# Altium PCB DataSampleHub.PcbDoc (part 2 of 3)
Units mil, origin at the board's own origin, x right, y up, seen from the top; angles counter-clockwise.
Board outline 7885.07 x 6309.28 mil, 2 copper layers (Top Layer, Bottom Layer), stack 65.792 mil thick; 360 components, 225 nets, 1247 pads, 854 vias.
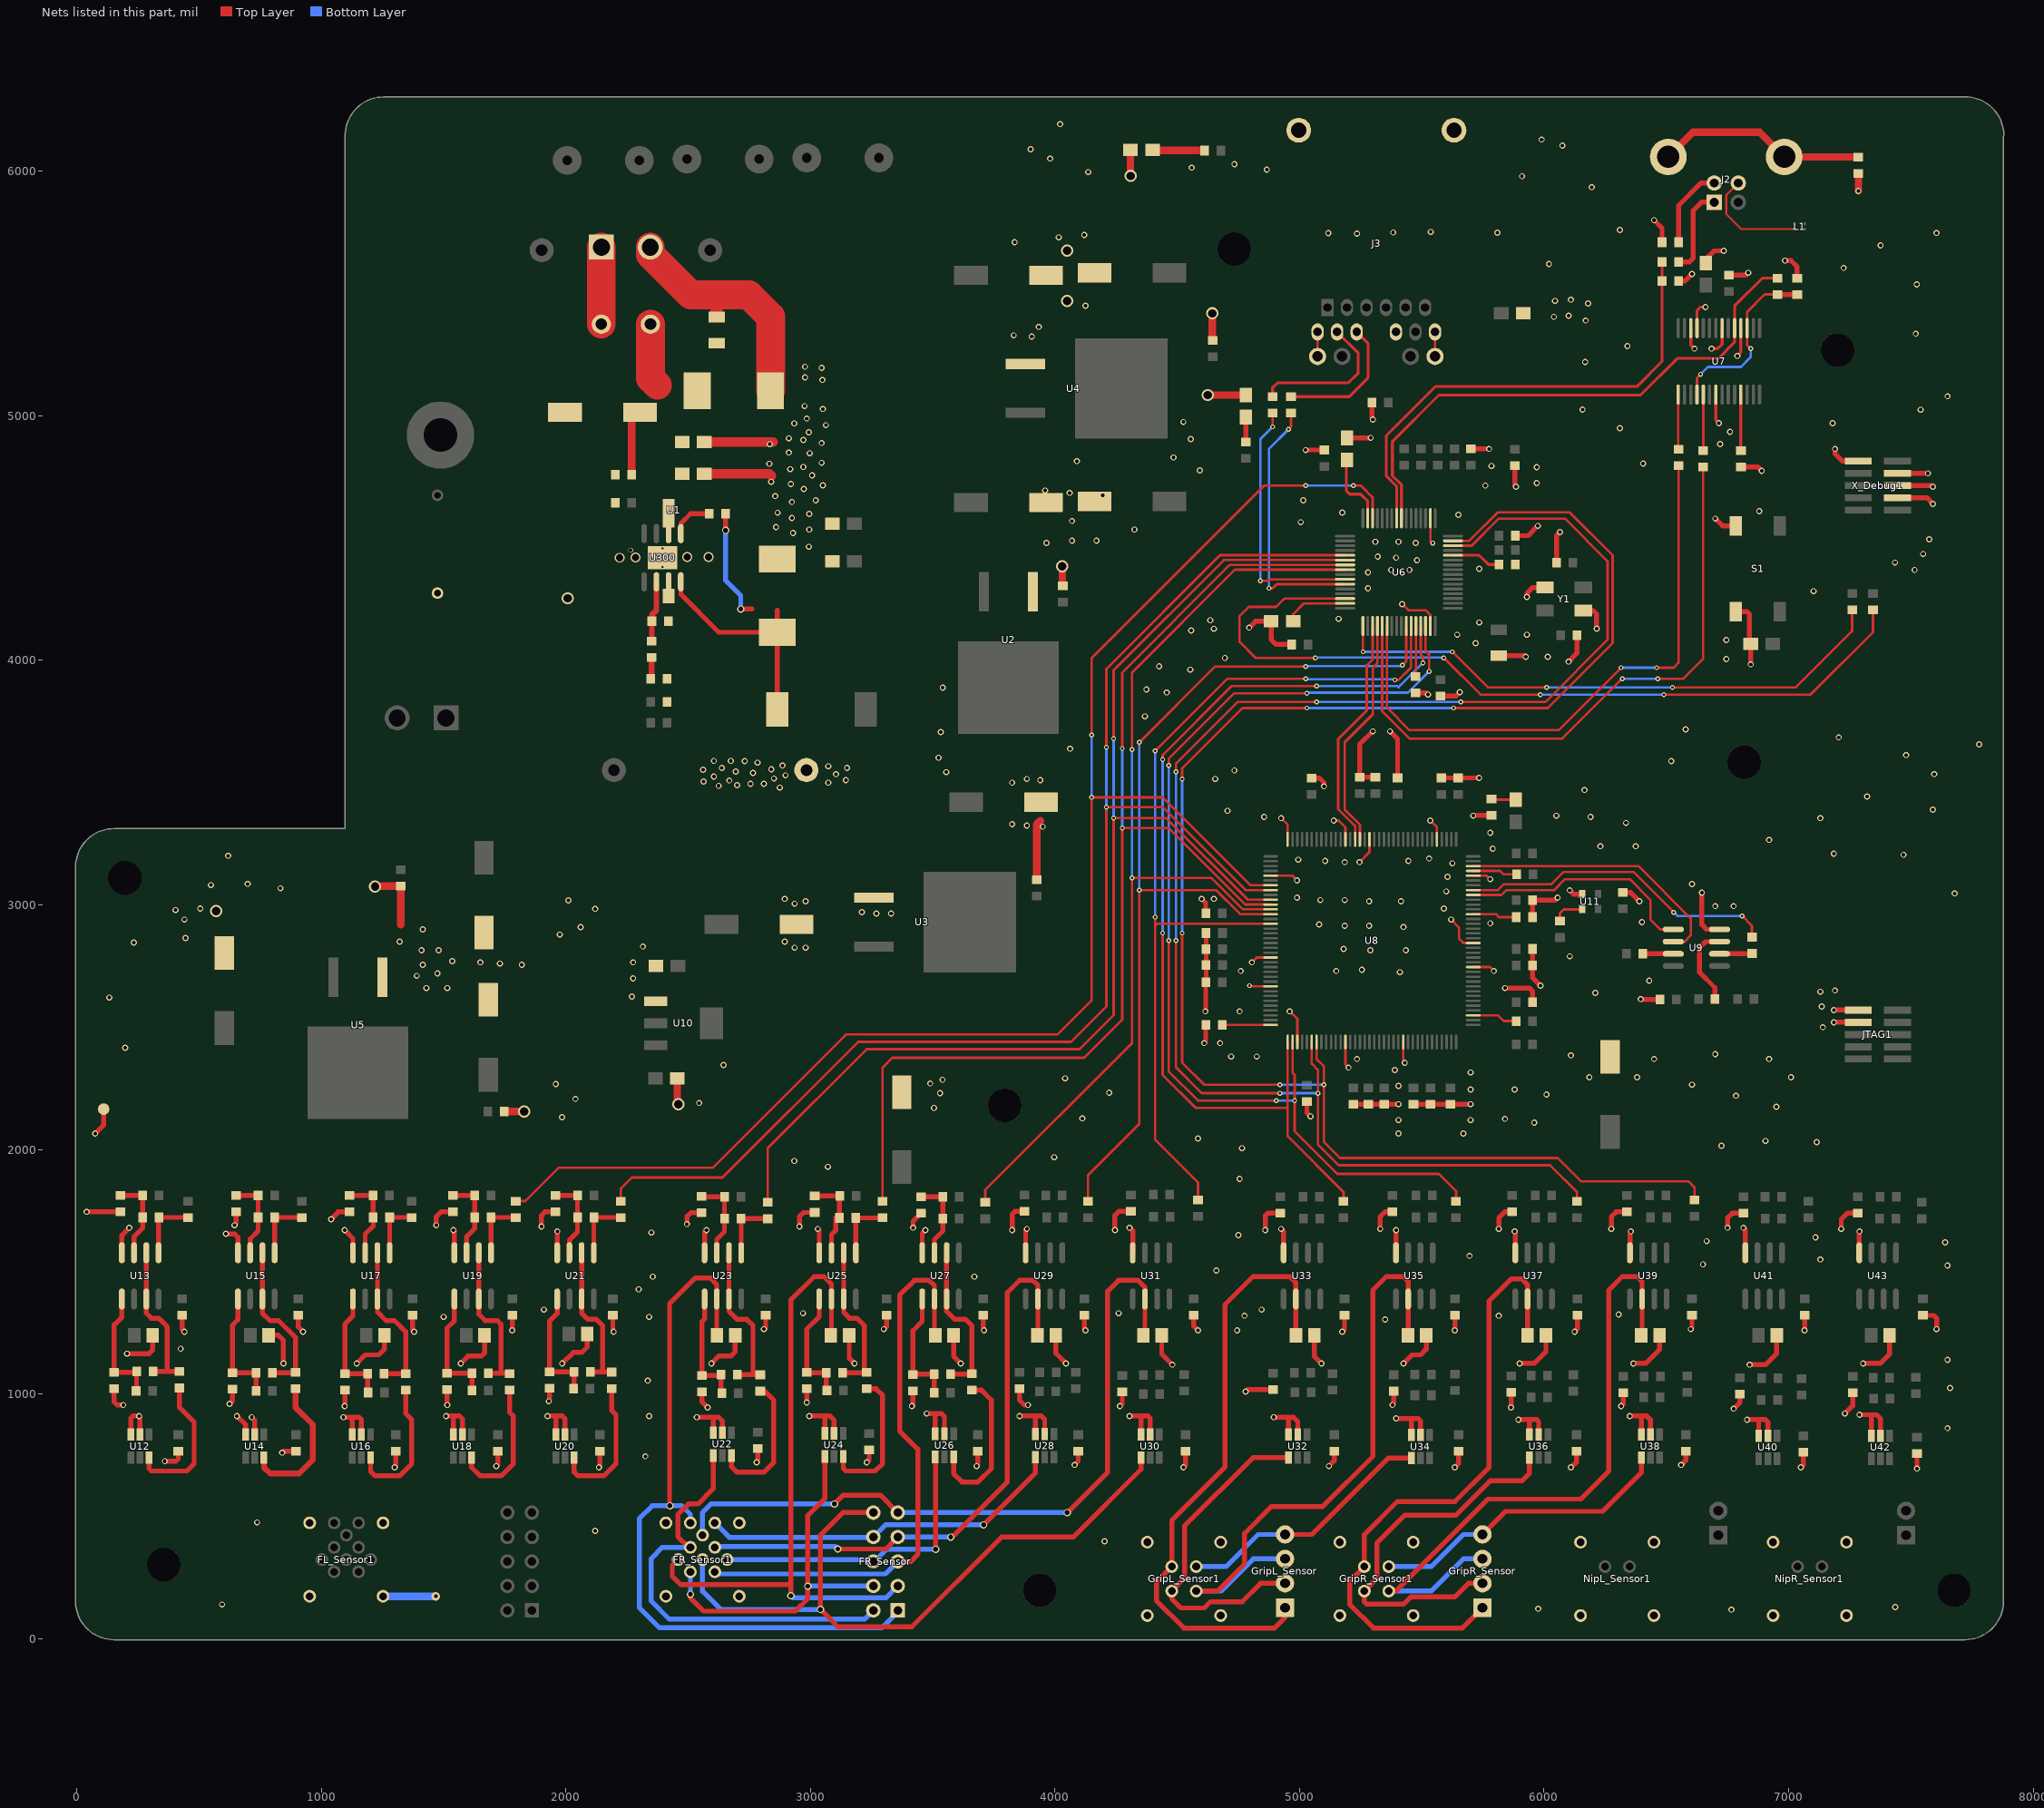
[diagram p2: the nets of this part, all layers, seen from the top]

## Via types
v1: diameter 25, hole 15, Top Layer to Bottom Layer, 584 vias
v2: diameter 20, hole 10, Top Layer to Bottom Layer, 130 vias
v3: diameter 30, hole 20, Top Layer to Bottom Layer, 103 vias
v4: diameter 50, hole 35, Top Layer to Bottom Layer, 11 vias
v5: diameter 100, hole 60, Top Layer to Bottom Layer, 7 vias
v6: diameter 50, hole 30, Top Layer to Bottom Layer, 4 vias
v7: diameter 40, hole 30, Top Layer to Bottom Layer, 4 vias
v8: diameter 19.68, hole 7.87, Top Layer to Bottom Layer, 4 vias
v9: diameter 80, hole 50, Top Layer to Bottom Layer, 2 vias
v10: diameter 133.86, hole 133.86, Top Layer to Bottom Layer, 2 vias
v11: diameter 35, hole 15, Top Layer to Bottom Layer, 1 vias
v12: diameter 60, hole 40, Top Layer to Bottom Layer, 1 vias
v13: diameter 20, hole 15, Top Layer to Bottom Layer, 1 vias

## Nets (pads, with @x,y where several pads share a name; then routed paths per layer and width w, separated by ;. In a path a pad name is that pad's centre, name@x,y a point inside that pad or via, vN(x,y) a via of type N, cw(c..) or ccw(c..) an arc to the next point about the centre after c; other vN are vias at no path point) (continued)
FL_SENSOR4: R23.2 U6.30 U8.115 | length 6522.6
  Top Layer w10: R23.2@1795,1788.46 1833.46,1788.46 1970,1925 2600,1925 3145,2470 4010,2470 4150,2610 v2(4150,3440) 4440,3440 4799.62,3080.38 U8.115@4881.63,3080.38 ; v2(4150,3695) 4150,4010 4855,4715 v2(5025,4715) ; v2(5220,4715) 5250,4715 5298.73,4666.27 U6.30@5298.73,4581.47
  Bottom Layer w10: v2(4150,3440) v2(4150,3695) ; v2(5025,4715) 5026.16,4716.16 5027.32,4715 v2(5220,4715)
FL_SENSOR5: R149.2 U6.37 U8.116 | length 5706.4
  Top Layer w10: R149.2@2225,1788.46 2225,1840 2270,1885 2640,1885 3195,2440 4065,2440 4210,2585 v2(4210,3400) 4440,3400 4779.31,3060.69 U8.116@4881.63,3060.69 ; v2(4210,3645) 4210,3965 4674.9,4429.9 U6.37@5186.53,4429.9
  Bottom Layer w10: v2(4210,3400) v2(4210,3645)
FPGA_CLK: U8.70 U9.6 | length 1130.2
  Top Layer w10: U8.70@5710.37,3159.12 6385.88,3159.12 6600,2945 6600,2875 6575,2850 U9.6@6528.51,2850
FPGA_DIN: R35.2 U8.65 | length 1308.1
  Top Layer w10: U8.65@5710.37,3060.69 5810.69,3060.69 5835,3085 6030,3085 6080,3135 6365,3135 v2(6530,2970) ; v2(6810,2955) 6850,2915 R35.2@6850,2868.46
  Bottom Layer w10: v2(6530,2970) 6545,2955 v2(6810,2955)
FPGA_MISO: R35.1 U9.2 | length 133.1
  Top Layer w20: U9.2@6717.49,2800 6848.46,2800 R35.1@6850,2801.54
FPGA_MOSI: U8.64 U9.5 | length 976.4
  Top Layer w10: U8.64@5710.37,3041.01 5826.01,3041.01 5845,3060 6040,3060 6085,3105 6350,3105 6435,3020 6435,2940 6475,2900 U9.5@6528.51,2900
FR_CON0: C72.2 FR_Sensor1.1 FR_Sensor.1 U23.6 | length 3050.7
  Top Layer w20: v3(2425,543) 2424,544 2424,1369 2530,1475 2590,1475 2617,1448 U23.6@2617,1388.51 2617,1240.6 C72.2@2617.6,1240
  Bottom Layer w20: FR_Sensor1.1@2509.06,472.83 2509.06,507.94 2474,543 v3(2425,543) 2353,543 2300,490 2300,127 2383,44 3292,44 3357.09,109.09 FR_Sensor.1@3357.09,115
FR_CON1: FR_Sensor1.2 FR_Sensor.2 U22.4 | length 1789.5
  Top Layer w20: FR_Sensor1.2@2509.06,372.83 2502.17,372.83 2458,417 2458,507 2501,550 2540,550 2602.6,612.6 U22.4@2602.6,747.76
  Bottom Layer w20: FR_Sensor1.2@2509.06,372.83 2394.83,372.83 2349,327 2349,153 2423,79 3221.09,79 FR_Sensor.2@3257.09,115
FR_CON2: C73.2 FR_Sensor1.3 FR_Sensor.3 U25.6 | length 2668
  Top Layer w20: FR_Sensor1.3@2459.06,322.83 2435,298.78 2435,255 2470,220 2910,220 2920,230 ; v3(2920,175) 2920,230 ; C73.2@3083.6,1240 3086,1242.4 U25.6@3086,1388.51 3086,1449 3055,1480 3015,1480 2920,1385 2920,230
  Bottom Layer w20: v3@2929,166 3308.09,166 FR_Sensor.3@3357.09,215
FR_CON3: FR_Sensor1.4 FR_Sensor.4 U24.4 | length 1509.8
  Top Layer w20: v3(2509.06,181) 2509.06,165.94 2563,112 2938,112 2989,163 v3(2989,214) 2989,503 3059.6,573.6 U24.4@3059.6,744.76
  Bottom Layer w20: v3(2509.06,181) FR_Sensor1.4@2509.06,272.83 ; v3(2989,214) 2990,215 FR_Sensor.4@3257.09,215
FR_CON4: C74.2 FR_Sensor1.5 FR_Sensor.5 U27.6 | length 2338.8
  Top Layer w20: FR_Sensor.5@3357.09,315 3410,315 3439,344 3439,775 3365,849 3365,1405 3425,1465 3485,1465 3507,1443 U27.6@3507,1388.51 3507,1243.6 C74.2@3510.6,1240
  Bottom Layer w20: FR_Sensor1.5@2609.06,272.83 2617.89,264 3306.09,264 FR_Sensor.5@3357.09,315
FR_CON5: FR_Sensor1.6 FR_Sensor.6 U26.4 | length 1255.2
  Top Layer w20: U26.4@3510.6,742.76 3512,741.35 v3(3512,365)
  Bottom Layer w20: FR_Sensor1.6@2659.06,322.83 3249.25,322.83 FR_Sensor.6@3257.09,315 3261,315 3311,365 v3(3512,365)
FR_CON6: C75.2 FR_Sensor1.7 FR_Sensor.7 U29.6 | length 2465.5
  Top Layer w20: v3(3112,366) 3308.09,366 FR_Sensor.7@3357.09,415 ; v3(3574,415) 3580,415 3805,640 3805,1415 3855,1465 3910,1465 3930,1445 U29.6@3930,1388.51 3930,1241.4 C75.2@3928.6,1240
  Bottom Layer w20: FR_Sensor1.7@2615.89,366 2605.89,376 3102,376 v3(3112,366) ; FR_Sensor.7@3357.09,415 v3(3574,415)
FR_CON7: FR_Sensor1.8 FR_Sensor.8 U28.4 | length 1576.9
  Top Layer w20: v3(3708,465) 3920.6,677.6 U28.4@3920.6,741.76
  Bottom Layer w20: 2656.89,425 FR_Sensor1.8@2609.06,472.83 2667.89,414 3256.09,414 FR_Sensor.8@3257.09,415 3307.09,465 v3(3708,465)
FR_CON8: C76.2 FR_Sensor1.9 FR_Sensor.9 U31.6 | length 3000
  Top Layer w20: v3(3098,550) 3134,586 3286.09,586 FR_Sensor.9@3357.09,515 ; v3(4050,515) 4215,680 4215,1420 4260,1465 4340,1465 4368,1437 U31.6@4368,1388.51 4368,1246.4 C76.2@4361.6,1240
  Bottom Layer w20: FR_Sensor1.9@2559.06,422.83 2559.06,516.06 2593,550 v3(3098,550) ; FR_Sensor.9@3357.09,515 v3(4050,515) v3@4049.17,515.83
FR_CON9: FR_Sensor1.10 FR_Sensor.10 U30.4 | length 2937.3
  Top Layer w20: FR_Sensor.10@3257.09,515 3133,515 3041,423 v3(3041,119) 3112,48 3415,48 3782,415 4075,415 4351.6,691.6 U30.4@4351.6,739.76
  Bottom Layer w20: 2559.06,240.94 FR_Sensor1.10@2559.06,322.83 2559.06,192.94 2633,119 v3(3041,119)
FR_SENSOR1: R150.2 U6.38 U8.118 | length 5185.1
  Top Layer w10: R150.2@2825,1783.46 2825,2005 3230,2410 4100,2410 4240,2550 v2(4240,3355) 4455,3355 4788.68,3021.32 U8.118@4881.63,3021.32 ; v2(4240,3680) 4240,3960 4690.21,4410.21 U6.38@5186.53,4410.21
  Bottom Layer w10: v2(4240,3355) v2(4240,3680)
FR_SENSOR2: R151.2 U6.39 U8.119 | length 4857.7
  Top Layer w10: R151.2@3295,1788.46 3295,2335 3335,2375 4120,2375 4275,2530 v2(4275,3315) 4465,3315 4778.36,3001.64 U8.119@4881.63,3001.64 ; v2(4275,3640) 4275,3950 4715.53,4390.53 U6.39@5186.53,4390.53
  Bottom Layer w10: v2(4275,3315) v2(4275,3640)
FR_SENSOR3: R152.2 U6.40 U8.120 | length 4080.6
  Top Layer w10: R152.2@3715,1783.46 3715,1835 4315,2435 v2(4315,3110) 4640,3110 4768.05,2981.95 U8.120@4881.63,2981.95 ; v2(4315,3635) 4315,3950 4735.84,4370.84 U6.40@5186.53,4370.84
  Bottom Layer w10: v2(4315,3110) v2(4315,3635)
FR_SENSOR4: R153.2 U6.58 U8.121 | length 3913.5
  Top Layer w10: R153.2@4135,1788.46 4135,1895 4345,2105 v2(4345,3060) 4660,3060 4757.73,2962.27 U8.121@4881.63,2962.27 ; v2(4345,3665) 4655,3975 v2(5025,3975) ; v2(5420,3980) 5436.53,3996.53 U6.58@5436.53,4140.53
  Bottom Layer w10: v2(4345,3060) v2(4345,3665) ; v2(5025,3975) 5027,3977 5417,3977 v2(5420,3980)
FR_SENSOR5: R154.2 U6.59 U8.123 | length 3744.9
  Top Layer w10: v2(4410,2950) 4410,2915 ; v2(4410,3630) 4705,3925 v2(5025,3925) ; R154.2@4585,1793.46 4585,1865 4410,2040 4410,2915 ; U8.123@4881.63,2922.9 4417.9,2922.9 4410,2915 ; v2(5390,3920) 5405,3920 5456.21,3971.21 U6.59@5456.21,4140.53
  Bottom Layer w10: v2(4410,2950) v2(4410,3630) ; v2(5025,3925) 5027,3923 5387,3923 v2(5390,3920)
FT232_RST: R19.1 U6.24 U7.19 | length 2267.3
  Top Layer w11.81: U6.24@5416.84,4581.47 5416.84,4718.16 5380,4755 5380,4895 5570,5085 6395,5085 6545,5235 6712.95,5235 6778.98,5301.02 U7.19@6778.98,5358.83 6778.98,5448.98 6893.47,5563.47 R19.1@6955,5563.47
GND: C1.2 C2.1 C3.2 C4.1 C5.2 C6.2 C7.1 C8.2 C9.2 C10.1 C11.2 C12.2 C13.1 C14.2 C15.1 C16.2 C17.2 C18.1 C19.2 C20.2 C21.2 C22.2 C23.2 C24.2 C25.2 C26.2 C27.2 C28.2 C29.1 C30.1 C31.1 C32.1 C33.1 C34.1 C35.1 C36.1 C37.1 C38.1 C39.1 C40.1 C41.1 C42.1 C43.1 C44.1 C45.1 C46.1 C47.1 C48.1 C49.1 C50.1 C51.1 C52.1 C53.1 C54.1 C55.1 C56.1 C57.1 C58.1 C59.1 C60.1 C62.1 C63.1 C64.1 C65.1 C66.1 C67.1 C68.1 C69.1 C70.1 C71.1 C72.1 C73.1 C74.1 C75.1 C76.1 C77.2 C78.1 C79.1 C80.1 C81.1 C82.1 C83.1 C84.1 C85.1 C86.1 C87.1 C88.1 C89.1 C90.1 C91.1 C92.1 C93.1 C94.2 C95.1 C96.1 C97.1 C98.1 C99.1 C100.1 C101.1 C102.1 C103.1 C104.1 C105.1 C106.1 C107.1 C152.1 C302.1 C303.1 C304.2 C305.1 C306.1 C307.1 C308.1 C309.1 D300.2 D301.2 FB1.1 FB3.2 FL_Sensor1.12 FL_Sensor1.13 FL_Sensor1.14 FL_Sensor1.15 FR_Sensor1.12 FR_Sensor1.13 FR_Sensor1.14 FR_Sensor1.15 GripL_Sensor1.6 GripL_Sensor1.7 GripL_Sensor1.8 GripL_Sensor1.9 GripR_Sensor1.6 GripR_Sensor1.7 GripR_Sensor1.8 GripR_Sensor1.9 J3.10 J3.17 J3.18 JTAG1.8 JTAG1.10 NipL_Sensor1.4 NipL_Sensor1.5 NipL_Sensor1.6 NipL_Sensor1.7 NipR_Sensor1.4 NipR_Sensor1.5 NipR_Sensor1.6 NipR_Sensor1.7 P300.2 pad.0@2420,4263 PWR1.2 R3.2 R5.1 R8.2 R20.2 R24.1 R26.1 R30.1 R31.1 R42.1 R43.1 R49.1 R50.1 R56.1 R57.1 R63.1 R64.1 R70.1 R71.1 R77.1 R78.1 R84.1 R85.1 R91.1 R92.1 R98.1 R99.1 R105.1 R106.1 R112.1 R113.1 R119.1 R120.1 R126.1 R127.1 R133.1 R134.1 R140.1 R141.1 R147.1 R148.1 R302.1 R303.1 S1.1 S1.2 STATUS1.2 TP1.1 U1.3 U2.1 U3.1 U4.1 U5.1 U6.18 U6.63 U7.7 U7.18 U7.21 U7.25 U7.26 U8.3 U8.13 U8.25 U8.49 U8.54 U8.68 U8.77 U8.91 U8.96 U8.108 U8.113 U8.130 U8.136 U9.4 U10.1 U11.2 U12.2 U12.3 U13.4 U14.2 U14.3 U15.4 U16.2 U16.3 U17.4 U18.2 U18.3 U19.4 U20.2 U20.3 U21.4 U22.2 U22.3 U23.4 U24.2 U24.3 U25.4 U26.2 U26.3 U27.4 U28.2 U28.3 U29.4 U30.2 U30.3 U31.4 U32.2 U32.3 U33.4 U34.2 U34.3 U35.4 U36.2 U36.3 U37.4 U38.2 U38.3 U39.4 U40.2 U40.3 U41.4 U42.2 U42.3 U43.4 U300.7 U300.9 VR300.2 X_Debug1.3 X_Debug1.5 X_Debug1.7 X_Debug1.10 Y1.2 Y1.4 | length 24012.4
  Top Layer w10: v2(4795,2670) 4798.01,2666.99 U8.136@4881.63,2666.99 ; v1(4805,2765) 4825.1,2785.1 U8.130@4881.63,2785.1 ; U8.113@4881.63,3119.75 4970.25,3119.75 v1(4990,3100) ; v1(4925,3355) 4951.51,3328.49 U8.108@4951.51,3268.37 ; v1(4960,2565) 4990.88,2534.12 U8.3@4990.88,2439.63 ; v1(5140,3345) 5160,3345 5187.73,3317.27 U8.96@5187.73,3268.37 ; U8.13@5187.73,2439.63 5187.73,2347.27 v1(5200,2335) ; v1(5245,3175) 5286.16,3216.16 U8.91@5286.16,3268.37 ; v1(5420,4230) 5445,4205 5515.96,4205 5534.95,4186.01 U6.63@5534.95,4140.53 ; U8.25@5423.95,2439.63 5423.95,2361.05 v1(5430,2355) ; U6.18@5534.95,4581.47 5534.95,4490.05 v2(5545,4480) ; v1(5535,3345) 5561.75,3318.25 U8.77@5561.75,3268.37 ; v1(5620,2940) 5652,2908 5652,2863 5670.84,2844.16 U8.54@5710.37,2844.16 ; U8.49@5710.37,2745.73 5779.27,2745.73 v1(5795,2730) ; U8.68@5710.37,3119.75 5765.25,3119.75 v1(5780,3105)
  Top Layer w12: U7.26@6599.84,5358.83 6599.84,5290.16 v1(6615,5275) ; U7.25@6625.43,5358.83 6625.43,5430.43 6640,5445 v1(6660,5445) ; v1(6685,5275) 6710,5275 6727.8,5292.8 U7.21@6727.8,5358.83 ; U7.7@6702.2,5087.17 6702.2,4982.8 v1(6715,4970) ; v1(6790,5245) 6804.57,5259.57 U7.18@6804.57,5358.83
  Top Layer w19.68: U300.9@2396,4421 U300.9@2421,4396
  Top Layer w20: v1(40,1745) 40.47,1744.53 R42.1@179,1744.53 ; v1(75,2065) 110,2100 TP1.1@110,2165 ; R43.1@153,1021.53 153,967 165,955 v1(190,955) ; U13.4@184.27,1577.49 184.27,1649.27 v1(215,1680) ; v1(205,1165) 295,1165 310.4,1180.4 C56.1@310.4,1240 ; U12.3@220.6,834.24 220.6,900.6 230,910 v1(255,910) 258,907 U12.2@258,834.24 ; v1(360,725) 405,725 415,735 C62.1@415,766.53 ; C63.1@431,1321.53 431,1264 v1(440,1255) ; v1(610,1655) 645,1655 659,1641 U15.4@659,1577.49 ; v1(625,960) 637,972 R50.1@637,1019.53 ; v1(645,1690) 652,1697 R49.1@652,1744.53 ; v1(655,910) 690.6,874.4 U14.3@690.6,834.24 ; v1(715,905) 728,892 U14.2@728,834.24 ; C57.1@784.4,1240 825,1240 845,1220 v1(845,1125) ; v1(840,760) 846.53,766.53 C64.1@897,766.53 ; C65.1@906,1321.53 906,1274 v1(925,1255) ; v1(1040,1715) 1069.53,1744.53 R56.1@1115,1744.53 ; v1(1090,905) 1135,905 ; v1(1095,950) 1096,951 R57.1@1096,1015.53 ; v1(1095,1670) 1129.27,1635.73 U17.4@1129.27,1577.49 ; U16.3@1126.6,834.24 1126.6,896.6 1135,905 ; v1(1145,1125) 1180,1160 1235,1160 1258.4,1183.4 C58.1@1258.4,1240 ; U16.2@1164,834.24 1164,896 1155,905 1135,905 ; v1(1300,700) 1304,704 C66.1@1304,766.53 ; C67.1@1373,1321.53 1373,1262 v1(1380,1255) ; v1(1470,1690) 1470,1725 1489.53,1744.53 R63.1@1538,1744.53 ; v1(1510,910) 1540,910 ; R64.1@1514,1017.53 1514,956 v1(1515,955) ; U18.3@1539.32,834.24 1539.32,909.32 1540,910 ; v1(1540,1670) 1544,1666 U19.4@1544,1577.49 ; v1(1570,1125) 1600,1155 1655,1155 1667.4,1167.4 C59.1@1667.4,1240 ; U18.2@1576.73,834.24 1576.73,898.27 1565,910 1540,910 ; v1(1715,705) 1722,712 C68.1@1722,766.53 ; v1(1780,1260) 1781,1261 C69.1@1781,1321.53 ; v1(1900,1685) 1900,1730 1914.54,1744.54 R70.1@1958,1744.54 ; v1(1925,910) 1960,910 ; v1(1930,970) 1933.54,973.54 R71.1@1933.54,1023.53 ; U20.3@1959.13,834.24 1959.13,909.13 1960,910 ; U21.4@1964.27,1577.49 1964.27,1664.27 v1(1965,1665) ; v1(1985,1125) 2030,1170 2065,1170 2087.4,1192.4 C60.1@2087.4,1245 ; U20.2@1996.54,834.24 1996.54,898.46 1985,910 1960,910 ; v1(2135,700) 2138.54,703.54 C70.1@2138.54,766.53 ; C71.1@2192,1321.53 2192,1258 v1(2195,1255) ; v1(2495,1695) 2495,1725 2511.53,1741.53 R77.1@2555,1741.53 ; v1(2535,905) 2600,905 ; R78.1@2556,1008.53 2556,969 v1(2580,945) ; U23.4@2567,1577.49 2567,1662 v1(2575,1670) ; v1(2595,1125) 2615.86,1145.86 2625,1155 2675,1155 2692.4,1172.4 C72.1@2692.4,1240 ; U22.3@2602.6,842.24 2602.6,902.4 2600,905 ; U22.2@2640,842.24 2640,890 2625,905 2600,905 ; v1(2780,720) 2785,725 C78.1@2785,776.53 ; v1(2810,1265) 2817,1272 C79.1@2817,1321.53 ; v1(2955,1685) 2955,1725 2972.53,1742.53 R84.1@3017.54,1742.53 ; v1(2985,965) R85.1@2985,1021.53 ; v1(2995,910) 3050,910 ; v1(3030,1675) 3036,1669 U25.4@3036,1577.49 ; U24.3@3059.6,839.24 3059.6,900.4 3050,910 ; U24.2@3097,839.24 3097,893 3080,910 3050,910 ; C73.1@3158.4,1240 3158.4,1146.6 v1(3180,1125) ; v1(3230,720) 3240,730 C80.1@3240,771.53 ; v1(3300,1265) 3311,1276 C81.1@3311,1321.53 ; v1(3415,950) 3419,954 R92.1@3419,1012.53 ; v1(3420,1680) 3420,1706.53 R91.1@3453,1739.53 ; U27.4@3457,1577.49 3457,1657 v1(3470,1670) ; v1(3475,920) 3505,920 ; U26.3@3510.6,837.24 3510.6,914.4 3505,920 ; U26.2@3548,837.24 3548,907 3535,920 3505,920 ; C74.1@3585.4,1240 3585.4,1154.6 v1(3615,1125) ; v1(3680,705) 3685,710 C82.1@3685,766.53 ; C83.1@3707,1321.53 3707,1263 v1(3710,1260) ; v1(3825,1670) 3825,1735 3836.53,1746.53 R98.1@3875,1746.53 ; v1(3855,910) 3920,910 ; R99.1@3855,1021.53 3855,975 3875,955 v1(3890,955) ; U29.4@3880,1577.49 3880,1670 v1(3885,1675) ; U28.3@3920.6,836.24 3920.6,909.4 3920,910 ; U28.2@3958,836.24 3958,897 3945,910 3920,910 ; C75.1@4003.4,1240 4003.4,1166.6 v1(4045,1125) ; v1(4080,710) 4095,725 C84.1@4095,766.53 ; C85.1@4120,1321.53 4120,1265 v1(4125,1260) ; v1(4245,1670) 4245,1730 4262.53,1747.53 R105.1@4310.54,1747.53 ; v1(4265,950) 4275,960 R106.1@4275,1008.53 ; v1(4305,910) 4380,910 4389,901 U30.2@4389,834.24 ; v1(4305,1680) 4318,1667 U31.4@4318,1577.49 ; U30.3@4351.6,834.24 4351.6,908.4 ; C76.1@4436.4,1240 4436.4,1163.6 v1(4480,1120) ; v1(4525,700) 4534,709 C86.1@4534,766.53 ; C87.1@4567,1321.53 4567,1278 v1(4585,1260) ; v1(4600,3025) 4616.54,3008.46 C32.1@4616.54,2966 ; v1(4610,2435) 4616.54,2441.54 R24.1@4616.54,2510 ; v1(4615,2565) 4616.54,2566.54 C35.1@4616.54,2684 4618.07,2685.54 C34.1@4618.07,2754 C52.1@4618.07,2819 C33.1@4618.07,2885 ; v1(4780,1010) 4787.53,1017.53 R113.1@4892,1017.53 ; v1(4794,4134) 4820,4160 C22.2@4884,4160 4884,4085 4904,4065 C25.2@4968.53,4065 ; v1(4860,1670) 4860,1730 4869.53,1739.53 R112.1@4921,1739.53 ; v1(4895,905) 4955,905 ; v1(4925,1675) 4935,1665 U33.4@4935,1577.49 ; U32.3@4955.6,834.24 4955.6,904.4 4955,905 ; U32.2@4993,834.24 4993,887 4975,905 4955,905 ; v1@5025.46,4860.46 C26.2@5102,4860.46 ; C36.1@5030,2196.53 5030,2150 v1(5045,2135) ; C47.1@5050,3518.46 5081.54,3518.46 5100,3500 v1(5100,3485) ; C88.1@5060.4,1240 5060.4,1154.6 v1(5090,1125) ; v1(5120,705) 5142,727 C95.1@5142,766.53 ; v1(5175,1255) 5184,1264 C96.1@5184,1321.53 ; C21.2@5195,4910 v1(5291,4910) ; C37.1@5220,2184.53 C48.1@5281,2184.53 C38.1@5347,2184.53 5404.53,2184.53 v1(5405,2185) ; v1@5296.54,4988.46 C30.1@5296.54,5055 ; v1(5300,3710) 5246,3656 C46.1@5246,3521.93 C51.1@5310,3521.93 ; v1(5330,1675) 5330,1725 5349.53,1744.53 R119.1@5379,1744.53 ; v1(5370,3710) 5401,3679 C45.1@5401,3519.46 ; v1(5380,955) 5385,960 R120.1@5385,1011.53 ; U35.4@5394.27,1577.49 5394.27,1669.27 v1(5395,1670) ; v1(5395,900) 5455,900 ; v1(5425,1125) 5460,1160 5495,1160 5518.4,1183.4 C89.1@5518.4,1240 ; U34.3@5457.6,832.24 5457.6,897.4 5455,900 ; C49.1@5466,2184.53 C39.1@5535,2184.53 C40.1@5617,2184.53 5699.53,2184.53 v1(5700,2185) ; R20.2@5475,3866.54 5518.46,3866.54 v1(5525,3860) ; U34.2@5495,832.24 5495,890 5485,900 5455,900 ; C24.2@5576,3854.54 5639.54,3854.54 v1(5655,3870) ; C44.1@5580,3519.46 R30.1@5649,3519.46 v1(5734.46,3519.46) ; v1(5635,700) 5650,715 C97.1@5650,766.53 ; v1(5635,1260) 5636,1261 C98.1@5636,1321.53 ; C27.2@5700,4865.46 v1@5774.54,4865.46 ; v1(5710,3365) 5711.53,3366.53 R31.1@5785,3366.53 ; v1(5815,1675) 5815,1720 5839.53,1744.53 R126.1@5870,1744.53 ; C23.2@5815,4018.85 5921.15,4018.85 v1(5925,4015) ; v1(5840,2660) 5940,2660 5952.46,2647.54 C41.1@5952.46,2602 ; v1(5865,945) R127.1@5865,1006.53 ; v1(5880,1665) 5882.27,1662.73 U37.4@5882.27,1577.49 ; v1@5880,4715 C107.1@5880,4796.54 ; C28.2@5882.46,4510 5935,4510 v1(5975,4550) ; v1(5895,895) 5940,895 ; v1(5900,1125) 5960,1125 6007.4,1172.4 C90.1@6007.4,1240 ; v1(5930,4260) 5930,4275 5953.24,4298.24 Y1.4@6003.26,4298.24 ; U36.3@5940.6,834.24 5940.6,894.4 5940,895 ; C42.1@5952.46,2820 C50.1@5952.46,2752 5952.46,2702.54 v1(5985,2670) ; R26.1@5953.46,2950 C43.1@5953.46,3020 6045,3020 v1(6055,3030) ; U36.2@5978,834.24 5978,887 5970,895 5940,895 ; C19.2@6051.53,4400 6051.53,4511.53 v1(6065,4525) ; v1(6100,3995) 6134.46,4029.46 C18.1@6134.46,4103 ; v1(6105,3060) 6121,3044 U11.2@6156.04,3044 ; v1(6110,700) 6133,723 C99.1@6133,766.53 ; v1(6125,1255) 6136,1266 C100.1@6136,1321.53 ; Y1.2@6160.74,4203.76 6201.24,4203.76 6215,4190 v1(6215,4130) ; v1(6275,1675) 6275,1725 6294.53,1744.53 R133.1@6339,1744.53 ; v1(6315,950) 6324,959 R134.1@6324,1005.53 ; C55.1@6322,3050.46 6354.54,3050.46 v1(6390,3015) ; v1(6350,910) 6395,910 ; U39.4@6351,1577.49 6351,1661 v1(6355,1665) ; v1(6365,1125) 6415,1125 6472.4,1182.4 C91.1@6472.4,1240 ; v1(6395,2615) 6396,2614 C31.1@6473.54,2614 ; U38.3@6397.6,834.24 6397.6,907.4 6395,910 ; U38.2@6435,834.24 6435,895 6420,910 6395,910 ; v1(6450,5800) 6482.54,5767.46 FB1.1@6482.54,5710 ; R5.1@6549.46,5552 6577,5552 v1(6605,5580) ; v1(6560,710) 6580,730 C101.1@6580,766.53 ; v1(6600,1265) 6605,1270 C102.1@6605,1321.53 ; v1(6645,3050) 6645,2920 6665,2900 U9.4@6717.49,2900 ; C15.1@6671,5615.15 6671,5651 6695,5675 v1(6735,5675) ; v1(6700,4580) 6730,4550 S1.1@6784,4550 ; v1(6750,1680) 6750,1720 6769.53,1739.53 R140.1@6816,1739.53 ; C16.2@6756,5575.46 6825.46,5575.46 v1(6835,5585) ; v1(6775,940) 6801,966 R141.1@6801,999.53 ; S1.2@6784,4200 6829,4200 6840,4189 C20.2@6840,4080 ; R8.2@6805,4791.54 6873.46,4791.54 v1(6890,4775) ; v1@6816,1681 v1(6815,1680) 6823,1672 U41.4@6823,1577.49 ; v1(6830,895) 6905,895 6915,885 U40.2@6915,829.24 ; v1(6840,1120) 6905,1120 6951.4,1166.4 C92.1@6951.4,1240 ; v1(6845,3984) C20.2@6845,4068 ; U40.3@6877.6,829.24 6877.6,892.4 ; v1(6985,5635) 7010,5635 7035,5610 C17.2@7035,5563.46 ; v1(7050,700) 7060,710 C103.1@7060,761.53 ; v1(7065,1260) 7066,1261 C104.1@7066,1321.53 ; v1(7185,2520) JTAG1.8@7285,2520 ; v1(7185,2570) JTAG1.10@7285,2570 ; v1(7190,4865) 7190,4845 7220,4815 X_Debug1.10@7285,4815 ; v1(7215,1675) 7215,1715 7239.53,1739.53 R147.1@7283.54,1739.53 ; v1(7230,920) 7262,952 R148.1@7262,1005.53 ; U43.4@7289,1577.49 v1@7289,1664 ; v1(7290,915) 7360,915 7376,899 U42.2@7376,829.24 ; v1(7305,1125) 7375,1125 7412.4,1162.4 C93.1@7412.4,1240 ; U42.3@7338.6,829.24 7338.6,911.4 ; X_Debug1.3@7445,4665 7565,4665 v1(7590,4640) ; X_Debug1.5@7445,4715 7585,4715 v1(7590,4710) ; X_Debug1.7@7445,4765 v1(7570,4765) ; v1(7525,695) C105.1@7525,756.53 ; C106.1@7549,1321.53 7593.47,1321.53 7605,1310 v1(7605,1265)
  Top Layer w30: C13.1@1748.46,2155 v4(1830,2155) ; C53.1@2456,2290 2456,2189 v4(2460,2185) ; C4.1@4029.81,4305 v4(4029.8,4385) ; v4(4309,5981) PWR1.2@4309,6087 ; v1(7285,5920) C152.1@7285,5991.54
  Top Layer w31.5: v4(1220,3075) 1221.53,3076.53 C2.1@1325,3076.53 1325,2920 ; C7.1@3925,3103.46 3925,3330 3940,3345 ; v4(4625,5085) STATUS1.2@4780,5085 ; v4(4644,5419) 4644,5309.46 C10.1@4645,5308.46
  Top Layer w39.37: C307.1@2566,4763 2832,4763 2840,4755 ; C306.1@2566,4893 2847,4893
  Top Layer w50: VR300.2@2616,5414 2616,5494 2617,5495
  Top Layer w118.11: P300.2@2345,5690 2345,5660 2510,5495 2617,5495 2748,5495 2837,5406 D301.2@2837,5103
  Bottom Layer w31.5: FL_Sensor1.14@1252.36,172.83 v11(1468.17,172.83)
  other v1: 6766,118 5976,122 7436,129 594,139 4203,398 2120,440 737,475 2325,745 7650,860 2340,910 7660,1025 2335,1055 7650,1140 425,1185 4745,1260 5350,1305 1500,1315 2340,1315 4775,1320 5815,1320 6305,1325 2970,1330 4260,1330 1910,1345 4845,1345 2298,1428 2355,1480 3670,1480 4660,1505 7650,1525 6650,1530 7130,1550 5695,1565 7640,1620 6665,1625 7110,1640 4750,1650 2350,1660 7290,1665 4755,1880 3071,1929 2934,1953 3997,1968 4765,2005 6725,2015 7115,2030 6905,2035 4585,2045 5405,2065 5670,2065 5960,2110 5405,2120 5700,2120 5840,2125 4112,2127 1984,2132 3505,2170 6950,2175 2545,2190 2039,2207 6785,2220 6010,2225 3530,2230 4222,2232 5700,2245 5880,2245 5405,2260 6605,2265 1959,2267 3490,2270 3540,2285 4041,2291 6185,2295 6380,2295 7010,2295 5700,2315 5390,2325 2645,2345 5235,2370 6450,2370 6920,2370 4720,2380 4825,2380 6110,2385 6700,2390 198,2416 4675,2435 7140,2500 4755,2565 7135,2585 133,2621 2270,2625 6210,2640 7130,2645 7190,2650 1430,2660 1515,2660 6430,2690 2275,2700 1390,2710 1475,2720 5410,2725 4760,2730 5150,2730 5255,2735 1415,2755 1820,2755 1730,2760 1650,2765 2275,2765 1535,2770 6105,2790 1410,2815 1480,2815 5290,2815 5435,2815 5180,2820 2935,2825 2980,2825 2315,2830 233,2846 1320,2850 2895,2850 445,2865 1975,2879 1415,2900 2060,2909 5425,2910 5185,2915 5285,2915 5080,2920 5780,2925 6400,2930 440,2940 3270,2965 3330,2965 3210,2970 404,2979 2120,2984 505,2985 5590,2985 6700,2995 6775,2995 2935,3005 2980,3015 5285,3015 5415,3015 2010,3019 5085,3020 5185,3020 2895,3025 4650,3025 4990,3030 7679,3047 5600,3055 833,3068 549,3081 6605,3085 699,3086 5605,3115 5625,3170 5185,3175 5105,3180 5445,3180 4995,3185 5530,3190 619,3201 7470,3205 7185,3210 5790,3230 6230,3240 6375,3240 6920,3266 5780,3295 3950,3320 3885,3325 3825,3330 6335,3335 7130,3355 4855,3360 6190,3360 6050,3365 4705,3385 7590,3390 7321,3443 6165,3470 2875,3480 2625,3487 2700,3490 2755,3495 2810,3495 3073,3500 3825,3500 2563,3505 2668,3509 3145,3510 3940,3510 3885,3515 4655,3515 2851,3517 2605,3525 2898,3530 3105,3535 7595,3535 2765,3540 3555,3543 2695,3545 4734,3550 2561,3553 2840,3555 2638,3560 3150,3560 3073,3567 2886,3570 2784,3582 2731,3588 6520,3588 2605,3589 2674,3589 3524,3602 7480,3613 4062,3639 7779,3657 7205,3685 3533,3707 6579,3718 4368,3771 4457,3869 4374,3881 3541,3889 4553,3962 4426,3976 6745,4005 4695,4010 6015,4015 5720,4070 6745,4083 5645,4105 5930,4105 4557,4122 4650,4129 5735,4155 4635,4164 5160,4170 7102,4283 5280,4295 5280,4360 5375,4370 5450,4370 7515,4370 5735,4375 7435,4400 5480,4410 5395,4420 5320,4425 7550,4435 2993,4465 3965,4480 5475,4480 5310,4485 5405,4485 4070,4490 4170,4490 7575,4495 2929,4521 2995,4535 4325,4535 2859,4545 5005,4565 4070,4570 2924,4582 5650,4595 2995,4599 2866,4604 5175,4605 6880,4610 2924,4648 3022,4655 5015,4655 2856,4672 4195,4675 4060,4685 3960,4695 2973,4701 5885,4710 5760,4715 3051,4716 2920,4721 5970,4725 2839,4730 3007,4757 4592,4777 2917,4782 5970,4790 2971,4791 5785,4795 2832,4804 6405,4805 3046,4808 4090,4815 4485,4830 2997,4847 2912,4850 5025,4860 5775,4865 2834,4884 6720,4885 3046,4889 2971,4901 4555,4905 2912,4908 2993,4933 6760,4935 6310,4950 3063,4962 2934,4969 7180,4970 4525,4975 5300,4985 2985,4989 7540,5025 6157,5026 3051,5028 2976,5040 7650,5080 3049,5147 2978,5157 3046,5196 2978,5201 6168,5220 6341,5285 3905,5324 3831,5329 7520,5336 3934,5364 6170,5390 6040,5405 6100,5410 4125,5450 6180,5460 6045,5470 6110,5475 7524,5538 7225,5605 6020,5621 7376,5697 3835,5710 4015,5730 4120,5740 5235,5745 5118,5747 7605,5748 5809,5749 5383,5750 5536,5752 6310,5760 6195,5935 5910,5980 4136,5997 4866,6007 4559,6015 4734,6029 3980,6052 3900,6090 6075,6105 5990,6130 4021,6193
  other v4: 570,2975 2007,4254 4050,5470 4050,5675
  other v7: 2220,4420 2285,4421 2495.83,4422.5 2583.83,4422.5
  other v8: 2395,4382.6 2347.76,4420 2442.24,4420 2395,4457.4
  other v13: 2264.69,4450.79
GRIPL_CON0: C88.2 GripL_Sensor1.1 GripL_Sensor.1 U33.6 | length 2519
  Top Layer w20: GripL_Sensor.1@4940.94,125.59 4940.94,85.94 4898,43 4527,43 4415,155 4415,231.54 GripL_Sensor1.1@4477.56,294.09 4477.56,482.56 4695,700 4695,1365 4810,1480 4960,1480 4985,1455 U33.6@4985,1388.51 4985,1240.6 C88.2@4985.6,1240
GRIPL_CON1: GripL_Sensor1.2 GripL_Sensor.2 U32.4 | length 1381.3
  Top Layer w20: GripL_Sensor.2@4940.94,225.59 4840.59,225.59 4765,150 4635,150 4610,125 4515,125 4477.56,162.44 GripL_Sensor1.2@4477.56,194.09 4530,246.54 4530,460 4809.76,739.76 U32.4@4955.6,739.76
GRIPL_CON2: C89.2 GripL_Sensor1.3 GripL_Sensor.3 U35.6 | length 2517.8
  Top Layer w20: GripL_Sensor1.3@4577.56,194.09 4664.09,194.09 4775,305 4775,430 4885,540 5095,540 5300,745 5300,1425 5355,1480 5425,1480 5444.27,1460.73 U35.6@5444.27,1388.51 5444.27,1240.68 C89.2@5443.6,1240
  Bottom Layer w20: GripL_Sensor1.3@4577.56,194.09 4679.09,194.09 4810.59,325.59 GripL_Sensor.3@4940.94,325.59
GRIPL_CON3: GripL_Sensor1.4 GripL_Sensor.4 U34.4 | length 1063.8
  Top Layer w20: GripL_Sensor.4@4940.94,425.59 5050.59,425.59 5362.76,737.76 U34.4@5457.6,737.76
  Bottom Layer w20: GripL_Sensor1.4@4577.56,294.09 4699.09,294.09 4830.59,425.59 GripL_Sensor.4@4940.94,425.59
GRIPL_SENSOR1: R159.2 U6.61 U8.1 | length 4001
  Top Layer w10: v2(4440,2885) 4440,2305 4575,2170 4951.51,2170 ; v2(4440,3595) 4440,3613 4722,3895 v2(5070,3895) ; U8.1@4951.51,2439.63 4951.51,2170 ; R159.2@5180,1788.46 5180,1825 4951.51,2053.49 4951.51,2170 ; U6.61@5495.58,4140.53 5495.58,4024.42 5505,4015 v2(5505,3990)
  Bottom Layer w10: v2(4440,2885) v2(4440,3595) ; v2(5070,3895) 5400,3895 5405,3890 v2(5505,3990)
GRIPL_SENSOR2: R160.2 U6.62 U8.2 | length 4418.5
  Top Layer w10: v2(4465,2855) 4465,2320 4585,2200 v2(4905,2200) ; v2(4465,3570) 4465,3598 4732,3865 v2(5030,3865) ; U8.2@4971.2,2439.63 4971.2,2313.8 4980,2305 v2(4980,2200) 4980,2075 5155,1900 5570,1900 5640,1830 R160.2@5640,1788.46 ; U6.62@5515.27,4140.53 5515.27,4039.73 5530,4025 v2(5530,3955)
  Bottom Layer w10: v2(4465,2855) v2(4465,3570) ; v2(4905,2200) v2(4980,2200) ; v2(5030,3865) 5033,3868 5443,3868 v2(5530,3955)
GRIPR_CON0: C90.2 GripR_Sensor1.1 GripR_Sensor.1 U37.6 | length 2642.8
  Top Layer w20: GripR_Sensor.1@5748.03,125.59 5665.44,43 5302,43 5205,140 5205,234.13 GripR_Sensor1.1@5264.96,294.09 5264.96,424.96 5400,560 5635,560 5775,700 5775,1380 5865,1470 5910,1470 5932.27,1447.73 U37.6@5932.27,1388.51 5932.27,1240.32 C90.2@5932.6,1240
GRIPR_CON1: GripR_Sensor1.2 GripR_Sensor.2 U36.4 | length 1591.4
  Top Layer w20: GripR_Sensor.2@5748.03,225.59 5690.59,225.59 5635,170 5455,170 5425,140 5275,140 5264.96,150.04 GripR_Sensor1.2@5264.96,194.09 5316,245.13 5316,391 5430,505 5640,505 5780,645 5910,645 5940.6,675.6 U36.4@5940.6,739.76
GRIPR_CON2: C91.2 GripR_Sensor1.3 GripR_Sensor.3 U39.6 | length 2668.8
  Top Layer w20: GripR_Sensor1.3@5364.96,194.09 5394.09,194.09 5770,570 6150,570 6265,685 6265,1425 6320,1480 6380,1480 6401,1459 U39.6@6401,1388.51 6401,1243.4 C91.2@6397.6,1240
  Bottom Layer w20: GripR_Sensor1.3@5364.96,194.09 5539.09,194.09 5670.59,325.59 GripR_Sensor.3@5748.03,325.59
GRIPR_CON3: GripR_Sensor1.4 GripR_Sensor.4 U38.4 | length 1253.6
  Top Layer w20: GripR_Sensor.4@5748.03,425.59 5842.44,520 6240,520 6397.6,677.6 U38.4@6397.6,739.76
  Bottom Layer w20: GripR_Sensor1.4@5364.96,294.09 5539.09,294.09 5670.59,425.59 GripR_Sensor.4@5748.03,425.59
GRIPR_SENSOR1: R157.2 U6.14 U8.6 | length 6519.7
  Top Layer w10: v2(4495,2855) 4495,2335 4600,2230 v2(4920,2230) ; v2(4495,3545) 4495,3578 4747,3830 v2(5070,3830) ; U8.6@5049.94,2439.63 5049.94,2350.06 5075,2325 5075,2020 5160,1935 6025,1935 6135,1825 R157.2@6135,1788.46 ; U6.14@5627.47,4469.27 5704.27,4469.27 5815,4580 6085,4580 6260,4405 6260,4085 6005,3830 v2(5660,3830)
  Bottom Layer w10: v2(4495,2855) v2(4495,3545) ; v2(4920,2230) v2(5075,2230) ; v2(5070,3830) v2(5660,3830)
GRIPR_SENSOR2: R158.2 U6.15 U8.7 | length 6990.8
  Top Layer w10: v2(4520,2885) 4520,2355 4610,2265 v2(4920,2265) ; v2(4520,3515) 4520,3558 4767,3805 v2(5030,3805) ; U8.7@5069.62,2439.63 5069.62,2370.38 5100,2340 v2(5100,2265) 5100,2030 5165,1965 6055,1965 6150,1870 6590,1870 6615,1845 R158.2@6615,1793.46 ; U6.15@5627.47,4488.95 5693.95,4488.95 5810,4605 6105,4605 6280,4430 6280,4070 6015,3805 v2(5630,3805)
  Bottom Layer w10: v2(4520,2885) v2(4520,3515) ; v2(4920,2265) v2(5100,2265) ; v2(5030,3805) v2(5630,3805)
HSWAPEN: R24.2 U8.144 | length 208.4
  Top Layer w10: R24.2@4673.46,2509 4683.46,2509 4683.98,2509.51 U8.144@4881.63,2509.51
INT_B: R27.2 U8.39 | length 186.1
  Top Layer w10: U8.39@5710.37,2548.88 5811.12,2548.88 5835,2525 R27.2@5886.54,2525
M0: R25.2 U8.69 | length 183.7
  Top Layer w10: U8.69@5710.37,3139.43 5820.57,3139.43 5835,3125 R25.2@5888.07,3125
M1: R26.2 U8.60 | length 181.2
  Top Layer w10: U8.60@5710.37,2962.27 5802.73,2962.27 5815,2950 R26.2@5886.54,2950
MRST: U6.52 U8.93 | length 953
  Top Layer w10: U8.93@5246.79,3268.37 5246.79,3328.21 5185,3390 5185,3665 5300,3780 5300,3970 5318.42,3988.42 U6.52@5318.42,4140.53
MRST1: R14.2 U6.43 | length 1072.3
  Top Layer w10: v2(4875,4295) 4890,4295 4906.79,4311.79 U6.43@5186.53,4311.79 ; v2(4955,4945) 4965,4955 R14.2@4965,5011.53
  Bottom Layer w10: v2(4875,4295) 4875,4865 v2(4955,4945)
MRST5: R6.1 U6.54 | length 2484.2
  Top Layer w10: U6.54@5357.79,4140.53 5357.79,3807.21 5450,3715 6060,3715 v2(6315,3970) ; v2(6460,3970) 6530,3970 6550,3990 R6.1@6550,4796.54
  Bottom Layer w10: v2(6315,3970) v2(6460,3970)
MTSR: U6.51 U8.94 | length 959.1
  Top Layer w10: U8.94@5227.1,3268.37 5227.1,3322.9 5158,3392 5158,3678 5275,3795 5275,3980 5298.73,4003.73 U6.51@5298.73,4140.53
MTSR1: R13.2 U6.42 | length 1056.5
  Top Layer w10: v2(4840,4325) 4875,4325 4881.47,4331.47 U6.42@5186.53,4331.47 ; v2(4890,4955) R13.2@4890,5011.53
  Bottom Layer w10: v2(4840,4325) 4840,4905 v2(4890,4955)
MTSR5: R7.1 U6.53 | length 2628
  Top Layer w10: U6.53@5338.1,4140.53 5338.1,3791.9 5450,3680 6075,3680 v2(6320,3925) ; v2(6465,3925) 6570,3925 6650,4005 R7.1@6650,4791.53
  Bottom Layer w10: v2(6320,3925) v2(6465,3925)
NetC17_1: C17.1 R19.2 U7.4 U7.17 | length 748.6
  Top Layer w10: U7.4@6625.43,5087.17 6625.43,5155.43 v2(6640,5170) ; v2(6845,5275) 6830.16,5289.84 U7.17@6830.16,5358.83 6830.16,5425.16 6901.54,5496.54 R19.2@6955,5496.54
  Top Layer w20: R19.2@6955,5496.54 C17.1@7035,5496.53
  Bottom Layer w10: v2(6640,5170) 6670,5200 6805,5200 6845,5240 v2(6845,5275)
NetC21_1: C21.1 U6.31 | length 302.4
  Top Layer w11.81: C21.1@5195,4820 5191,4816 5191,4695 5206,4680 5250,4680 5279.05,4650.95 U6.31@5279.05,4581.47
NetC22_1: C22.1 U6.47 | length 259.8
  Top Layer w10: C22.1@4974,4160 4974,4189 5018.05,4233.05 U6.47@5186.53,4233.05
NetC152_2: C152.2 J2.5 J2.6 | length 860.9
  Top Layer w30: J2.5@6507.99,6059.06 6608.93,6160 6881.07,6160 J2.6@6982.01,6059.06 6982.61,6058.46 C152.2@7285,6058.46
NetC300_1: C300.1 D300.1 L300.1 U300.8 | length 1376.7
  Top Layer w19.68: U300.8@2470,4321.57 2470,4270 2625,4115 D300.1@2865,4115 ; v3(2653.46,4531.54) C300.1@2653.46,4600 ; v3(2715,4210) 2760,4210 ; L300.1@2863.9,3800 2865,3801.1 D300.1@2865,4115 ; 2865,4205 D300.1@2865,4115
  Bottom Layer w19.68: v3(2653.46,4531.54) 2653.46,4326.54 2715,4265 v3(2715,4210)
NetC300_2: C300.2 U300.1 | length 174.7
  Top Layer w19.68: U300.1@2470,4518.43 2470,4560 2510,4600 C300.2@2586.54,4600
NetC304_1: C304.1 C305.2 C306.2 C307.2 D301.1 F300.2 pad.1@2420.17,4602 U300.2 VR300.1 | length 531.6
  Top Layer w31.5: C305.2@2268.46,4760 2268.46,4979.92 C304.1@2303.54,5015
  Top Layer w118.11: F300.2@2345.79,5375 2345.79,5154.21 2375,5125
NetC308_2: C308.2 R301.2 U300.6 | length 251.4
  Top Layer w23.62: R301.2@2350,4078.46 2351.54,4080 C308.2@2351.54,4160 2351.54,4186.54 2370,4205 U300.6@2370,4321.57
NetC309_2: C309.2 R301.1 | length 88
  Top Layer w23.62: C309.2@2346.54,3925 2350,3928.46 R301.1@2350,4011.54
NetF300_1: F300.1 P300.1 | length 315
  Top Layer w118.11: F300.1@2145,5375 P300.1@2145,5690
NetFB1_2: FB1.2 J2.4 | length 334.3
  Top Layer w20: FB1.2@6549.46,5710 6549.46,5859.46 6642.37,5952.37 J2.4@6695.79,5952.37
NetFB3_1: FB3.1 U6.12 | length 203.8
  Top Layer w11.81: U6.12@5627.47,4429.9 5735.1,4429.9 5773,4392 FB3.1@5815.53,4392
NetJ2_1: J2.1 R4.1 | length 361.9
  Top Layer w20: R4.1@6549.46,5629 6594,5629 6610,5645 6610,5840 6643.63,5873.63 J2.1@6695.79,5873.63
NetJ2_3: J2.3 L1.4 | length 451
  Top Layer w8: J2.3@6794.21,5952.37 6745,5903.16 6745,5825 6806.14,5763.86 L1.4@7022.95,5763.86
NetJ3_7: J3.7 J3.13 | length 100
  Top Layer w10: J3.13@5074,5243 J3.7@5074,5343
NetJ3_8: J3.8 R13.1 | length 615
  Top Layer w11.81: R13.1@4890,5078.46 4890,5115 4910,5135 5200,5135 5240,5175 5240,5257 J3.8@5154,5343
NetJ3_9: J3.9 R14.1 | length 553.8
  Top Layer w11.81: R14.1@4965,5078.46 5203.46,5078.46 5280,5155 5280,5297 J3.9@5234,5343
NetJ3_12: J3.12 J3.16 | length 100
  Top Layer w10: J3.16@5554,5243 J3.12@5554,5343
NetLED1_2: LED1.2 R31.2 | length 101.4
  Top Layer w11.81: R31.2@5785,3433.46 5788.46,3430 LED1.2@5885,3430
NetPWR1_1: PWR1.1 R2.1 | length 213.4
  Top Layer w31.5: PWR1.1@4399,6087 4401,6085 R2.1@4611.53,6085
NetR4_2: R4.2 R5.2 U6.25 | length 2015.3
  Top Layer w11.81: U6.25@5397.16,4581.47 5397.16,4711.24 5355,4753.4 5355,4920 5555,5120 6380,5120 6482.54,5222.54 R5.2@6482.54,5552 R4.2@6482.54,5629
NetR6_2: R6.2 U7.1 | length 224.3
  Top Layer w10: U7.1@6548.66,5087.17 6548.66,4864.8 R6.2@6550,4863.46
NetR7_2: R7.2 U7.5 | length 229.1
  Top Layer w11.81: R7.2@6650,4858.46 6651.02,4859.49 U7.5@6651.02,5087.17
NetR8_1: R8.1 U7.11 | length 228.9
  Top Layer w11.81: U7.11@6804.57,5087.17 6804.57,4858.9 R8.1@6805,4858.46
NetR15_1: R15.1 R40.2 U13.1 | length 261.2
  Top Layer w20: U13.1@334.27,1577.49 334.27,1714.81 341.46,1722 454.53,1722 R15.1@455,1721.54
NetR16_1: R16.1 R47.2 U15.1 | length 256.5
  Top Layer w20: U15.1@809,1577.49 808.46,1578.02 R47.2@808.46,1722 919.53,1722 R16.1@920,1721.54
NetR17_1: R17.1 U6.46 | length 3444.5
  Top Layer w10: v2(5065,4010) 4821,4010 4755,4076 4755,4181 4793,4219 4904,4219 4937.73,4252.73 U6.46@5186.53,4252.73 ; v2(5590,4010) 5740,3860 v2(5985,3860) ; v2(6490,3860) 7090,3860 7345,4115 R17.1@7345,4206.54
  Bottom Layer w10: v2(5065,4010) 5067,4012 5588,4012 v2(5590,4010) ; v2(5985,3860) v2(6490,3860)
NetR18_1: R18.1 U6.49 | length 2347.7
  Top Layer w10: U6.49@5259.36,4140.53 5259.36,4035.64 v2(5260,4035) ; v2(5625,4035) 5770,3890 v2(6010,3890) ; v2(6525,3890) 7030,3890 7260,4120 R18.1@7260,4206.54
  Bottom Layer w10: v2(5260,4035) v2(5625,4035) ; v2(6010,3890) v2(6525,3890)
NetR20_1: R20.1 U6.60 | length 207.4
  Top Layer w10: R20.1@5475,3933.46 5475.9,3934.36 U6.60@5475.9,4140.53
NetR21_1: R21.1 STATUS1.1 | length 101.5
  Top Layer w20: R21.1@4780,4893.47 STATUS1.1@4780,4995
NetR22_1: R22.1 R54.2 U17.1 | length 235.3
  Top Layer w20: U17.1@1279.27,1577.49 1279.46,1577.68 R54.2@1279.46,1722 1369.53,1722 R22.1@1370,1721.54
NetR23_1: R23.1 R61.2 U19.1 | length 245.4
  Top Layer w20: U19.1@1694,1577.49 1694,1721.54 R61.2@1694.46,1722 1794.53,1722 R23.1@1795,1721.54
NetR33_1: R33.1 U9.7 | length 125
  Top Layer w20: R33.1@6403.46,2800 U9.7@6528.51,2800
NetR34_1: R34.1 U9.3 | length 329.1
  Top Layer w20: R34.1@6698.46,2615 6698.46,2661.54 6635,2725 6635,2825 6660,2850 U9.3@6717.49,2850
NetR36_2: R36.2 U11.3 | length 130.9
  Top Layer w10: R36.2@6065,2933.46 6065,2966.54 6080,2981.54 6154.6,2981.54 U11.3@6156.04,2982.98
NetR37_1: R37.1 U12.6 | length 580.5
  Top Layer w20: U12.6@295.4,739.76 295.4,694.6 305,685 450,685 480,715 480,885 420,945 R37.1@420,1024.53
NetR37_2: R37.2 R41.2 U13.2 U13.7 | length 646.7
  Top Layer w20: U13.2@284.27,1577.49 U13.7@284.27,1388.51 284.27,1330.73 305,1310 335,1310 370,1275 370,1093 ; R41.2@311.46,1093 370,1093 ; R37.2@420,1091.46 418.46,1093 370,1093
NetR38_1: R38.1 R40.1 R42.2 U13.3 | length 338.8
  Top Layer w20: R42.2@179,1811.46 269,1811.46 269.54,1810.93 R40.1@269.54,1722 269.54,1679.54 234.27,1644.27 U13.3@234.27,1577.49
NetR39_1: R39.1 R41.1 R43.2 U13.5 | length 487.2
  Top Layer w20: U13.5@184.27,1388.51 184.27,1314.27 153,1283 R43.2@153,1088.46 240,1088.46 R41.1@244.54,1093 244.54,1015 R39.1@242.54,1013
NetR44_1: R44.1 U14.6 | length 593.3
  Top Layer w23.62: U14.6@765.4,739.76 765.4,699.6 790,675 910,675 965,730 965,875 895,945 R44.1@895,1021.53
NetR44_2: R44.2 R48.2 U15.2 U15.7 | length 662
  Top Layer w20: U15.2@759,1577.49 U15.7@759,1388.51 759,1331 790,1300 825,1300 895,1230 R44.2@895,1088.46 893.54,1087 R48.2@799.46,1087
NetR45_1: R45.1 R47.1 R49.2 U15.3 | length 337.7
  Top Layer w20: R49.2@652,1811.46 741,1811.46 R45.1@741.54,1812 R47.1@741.54,1722 741.54,1666.54 709,1634 U15.3@709,1577.49
NetR46_1: R46.1 R48.1 R50.2 U15.5 | length 481.9
  Top Layer w20: U15.5@659,1388.51 659,1304 637,1282 R50.2@637,1086.46 732,1086.46 R48.1@732.54,1087 R46.1@732.54,1012
NetR51_1: R51.1 U16.6 | length 564.1
  Top Layer w20: U16.6@1201.4,739.76 1201.4,683.6 1220,665 1320,665 1370,715 1370,895 1345,920 R51.1@1345,1015.53
NetR51_2: R51.2 R55.2 U17.2 U17.7 | length 652.2
  Top Layer w20: U17.2@1229.27,1577.49 U17.7@1229.27,1388.51 1229.27,1335.73 1265,1300 1300,1300 1345,1255 R51.2@1345,1082.46 1344.46,1083 R55.2@1256.46,1083
NetR52_1: R52.1 R54.1 R56.2 U17.3 | length 345.5
  Top Layer w20: R56.2@1115,1811.46 1211,1811.46 R52.1@1211.54,1812 1211.54,1723 R54.1@1212.54,1722 1212.54,1687.54 1179.27,1654.27 U17.3@1179.27,1577.49
NetR53_1: R53.1 R55.1 R57.2 U17.5 | length 491.4
  Top Layer w20: U17.5@1129.27,1388.51 1129.27,1319.27 1096,1286 R57.2@1096,1082.46 1189,1082.46 R55.1@1189.54,1083 1189.54,1008 R53.1@1191.54,1006
NetR58_1: R58.1 U18.6 | length 552.1
  Top Layer w20: U18.6@1614.13,739.76 1614.13,700.87 1650,665 1735,665 1785,715 1785,910 1770,925 R58.1@1770,1015.53
NetR58_2: R58.2 R62.2 U19.2 U19.7 | length 647.1
  Top Layer w20: U19.2@1644,1577.49 U19.7@1644,1388.51 1644,1326 1670,1300 1720,1300 1735,1285 1735,1085 ; R62.2@1683.46,1085 1735,1085 ; R58.2@1770,1082.46 1767.46,1085 1735,1085
NetR59_1: R59.1 R61.1 R63.2 U19.3 | length 338.2
  Top Layer w20: R63.2@1538,1811.46 1538.54,1812 R59.1@1627.54,1812 R61.1@1627.54,1722 1627.54,1677.54 1594,1644 U19.3@1594,1577.49
NetR60_1: R60.1 R62.1 R64.2 U19.5 | length 490.6
  Top Layer w20: U19.5@1544,1388.51 1544,1299 1514,1269 R64.2@1514,1084.46 1514.54,1085 R62.1@1616.54,1085 1616.54,1015 R60.1@1615.54,1014
NetR65_1: R65.1 U20.6 | length 571.9
  Top Layer w20: U20.6@2033.94,739.76 2033.94,681.06 2050,665 2155,665 2205,715 2205,915 2187.54,932.46 R65.1@2187.54,1022.53
NetR65_2: R65.2 R69.2 U21.2 U21.7 | length 632.7
  Top Layer w20: U21.2@2064.27,1577.49 U21.7@2064.27,1388.51 2064.27,1330.73 2090,1305 2125,1305 2150,1280 2150,1096 2145,1091 ; R69.2@2100,1091 2145,1091 ; R65.2@2187.54,1089.46 2186,1091 2145,1091
NetR66_1: R66.1 R68.1 R70.2 U21.3 | length 339.5
  Top Layer w20: R70.2@1958,1811.47 1958.54,1812 R66.1@2048.54,1812 2047.54,1811 R68.1@2047.54,1722 2047.54,1662.54 2014.27,1629.27 U21.3@2014.27,1577.49
NetR67_1: R67.1 R69.1 R71.2 U21.5 | length 480.4
  Top Layer w20: U21.5@1964.27,1388.51 1964.27,1329.27 1933.54,1298.54 R71.2@1933.54,1090.46 1934.07,1091 R69.1@2033.07,1091 2033.07,1024 R67.1@2031.07,1022
NetR68_2: R68.2 R149.1 U21.1 | length 257
  Top Layer w20: U21.1@2114.27,1577.49 2114.27,1721.81 R68.2@2114.46,1722 2220.47,1722 R149.1@2225,1726.54
NetR72_1: R72.1 U22.6 | length 568.8
  Top Layer w20: U22.6@2677.4,747.76 2677.4,702.6 2700,680 2810,680 2850,720 2850,975 2813.47,1011.53 R72.1@2795,1011.53
NetR72_2: R72.2 R76.2 U23.2 U23.7 | length 655.7
  Top Layer w20: U23.2@2667,1577.49 U23.7@2667,1388.51 2667,1338 2700,1305 2740,1305 2765,1280 2765,1080 ; R76.2@2701.46,1080 2765,1080 ; R72.2@2795,1078.46 2793.46,1080 2765,1080
NetR73_1: R73.1 R75.1 R77.2 U23.3 | length 336.1
  Top Layer w20: R77.2@2555,1807 R73.1@2648.54,1807 R75.1@2648.54,1717 2648.54,1663.54 2617,1632 U23.3@2617,1577.49
NetR74_1: R74.1 R76.1 R78.2 U23.5 | length 476.7
  Top Layer w20: U23.5@2567,1388.51 2567,1307 2556,1296 R78.2@2556,1075.46 2630,1075.46 R76.1@2634.54,1080 2634.54,1007 R74.1@2638.54,1003
NetR75_2: R75.2 R150.1 U23.1 | length 249.9
  Top Layer w20: U23.1@2717,1577.49 2717,1715.46 R75.2@2715.46,1717 2824.53,1717 R150.1@2825,1716.54
NetR79_1: R79.1 U24.6 | length 582.6
  Top Layer w20: U24.6@3134.4,744.76 3134.4,695.6 3145,685 3265,685 3295,715 3295,995 3268.47,1021.53 R79.1@3230,1021.53
NetR79_2: R79.2 R83.2 U25.2 U25.7 | length 633.5
  Top Layer w20: R83.2@3131.46,1087 3228.54,1087 R79.2@3230,1088.46 ; U25.2@3136,1577.49 U25.7@3136,1388.51 3136,1334 3160,1310 3190,1310 3220,1280 R79.2@3220,1095.54
NetR80_1: R80.1 R82.1 R84.2 U25.3 | length 340.3
  Top Layer w20: R84.2@3017.54,1809.46 3115.61,1809.46 3118.07,1807 R82.1@3118.07,1720 ; U25.3@3086,1577.49 3086,1651 3103.54,1668.54 R82.1@3103.54,1722
NetR81_1: R81.1 R83.1 R85.2 U25.5 | length 474.6
  Top Layer w20: U25.5@3036,1388.51 3036,1316 2985,1265 R85.2@2985,1088.46 2986.46,1087 R83.1@3064.54,1087 3064.54,1018 R81.1@3067.54,1015
NetR82_2: R82.2 R151.1 U25.1 | length 253.6
  Top Layer w20: U25.1@3186,1577.49 3186,1719 R82.2@3185,1720 3293.46,1720 R151.1@3295,1721.54
NetR86_1: R86.1 U26.6 | length 637.1
  Top Layer w20: U26.6@3585.4,742.76 3585.4,674.6 3620,640 3685,640 3740,695 3740,975 3698.47,1016.53 R86.1@3660,1016.53
NetR86_2: R86.2 R90.2 U27.2 U27.7 | length 651.6
  Top Layer w20: U27.2@3557,1577.49 U27.7@3557,1388.51 3557,1338 3590,1305 3635,1305 3660,1280 R86.2@3660,1083.46 3657.54,1081 R90.2@3572.46,1081
NetR87_1: R87.1 R89.1 R91.2 U27.3 | length 332.6
  Top Layer w20: R91.2@3453,1806.46 3453.54,1807 R87.1@3541.54,1807 R89.1@3541.54,1717 3541.54,1666.54 3507,1632 U27.3@3507,1577.49
NetR88_1: R88.1 R90.1 R92.2 U27.5 | length 488
  Top Layer w20: U27.5@3457,1388.51 3457,1297 3419,1259 R92.2@3419,1079.46 3420.54,1081 R90.1@3505.54,1081 R88.1@3505.54,1005